# Altium PCB test.PcbDoc
Units mm, origin at the board's own origin, x right, y up, seen from the top; angles counter-clockwise.
Board outline 40 x 60 mm, 4 copper layers (Top Layer, Mid-Layer 1, Mid-Layer 2, Bottom Layer); 24 components, 23 nets, 166 pads, 0 vias.
Unrouted connection lines stored in the file: 42.
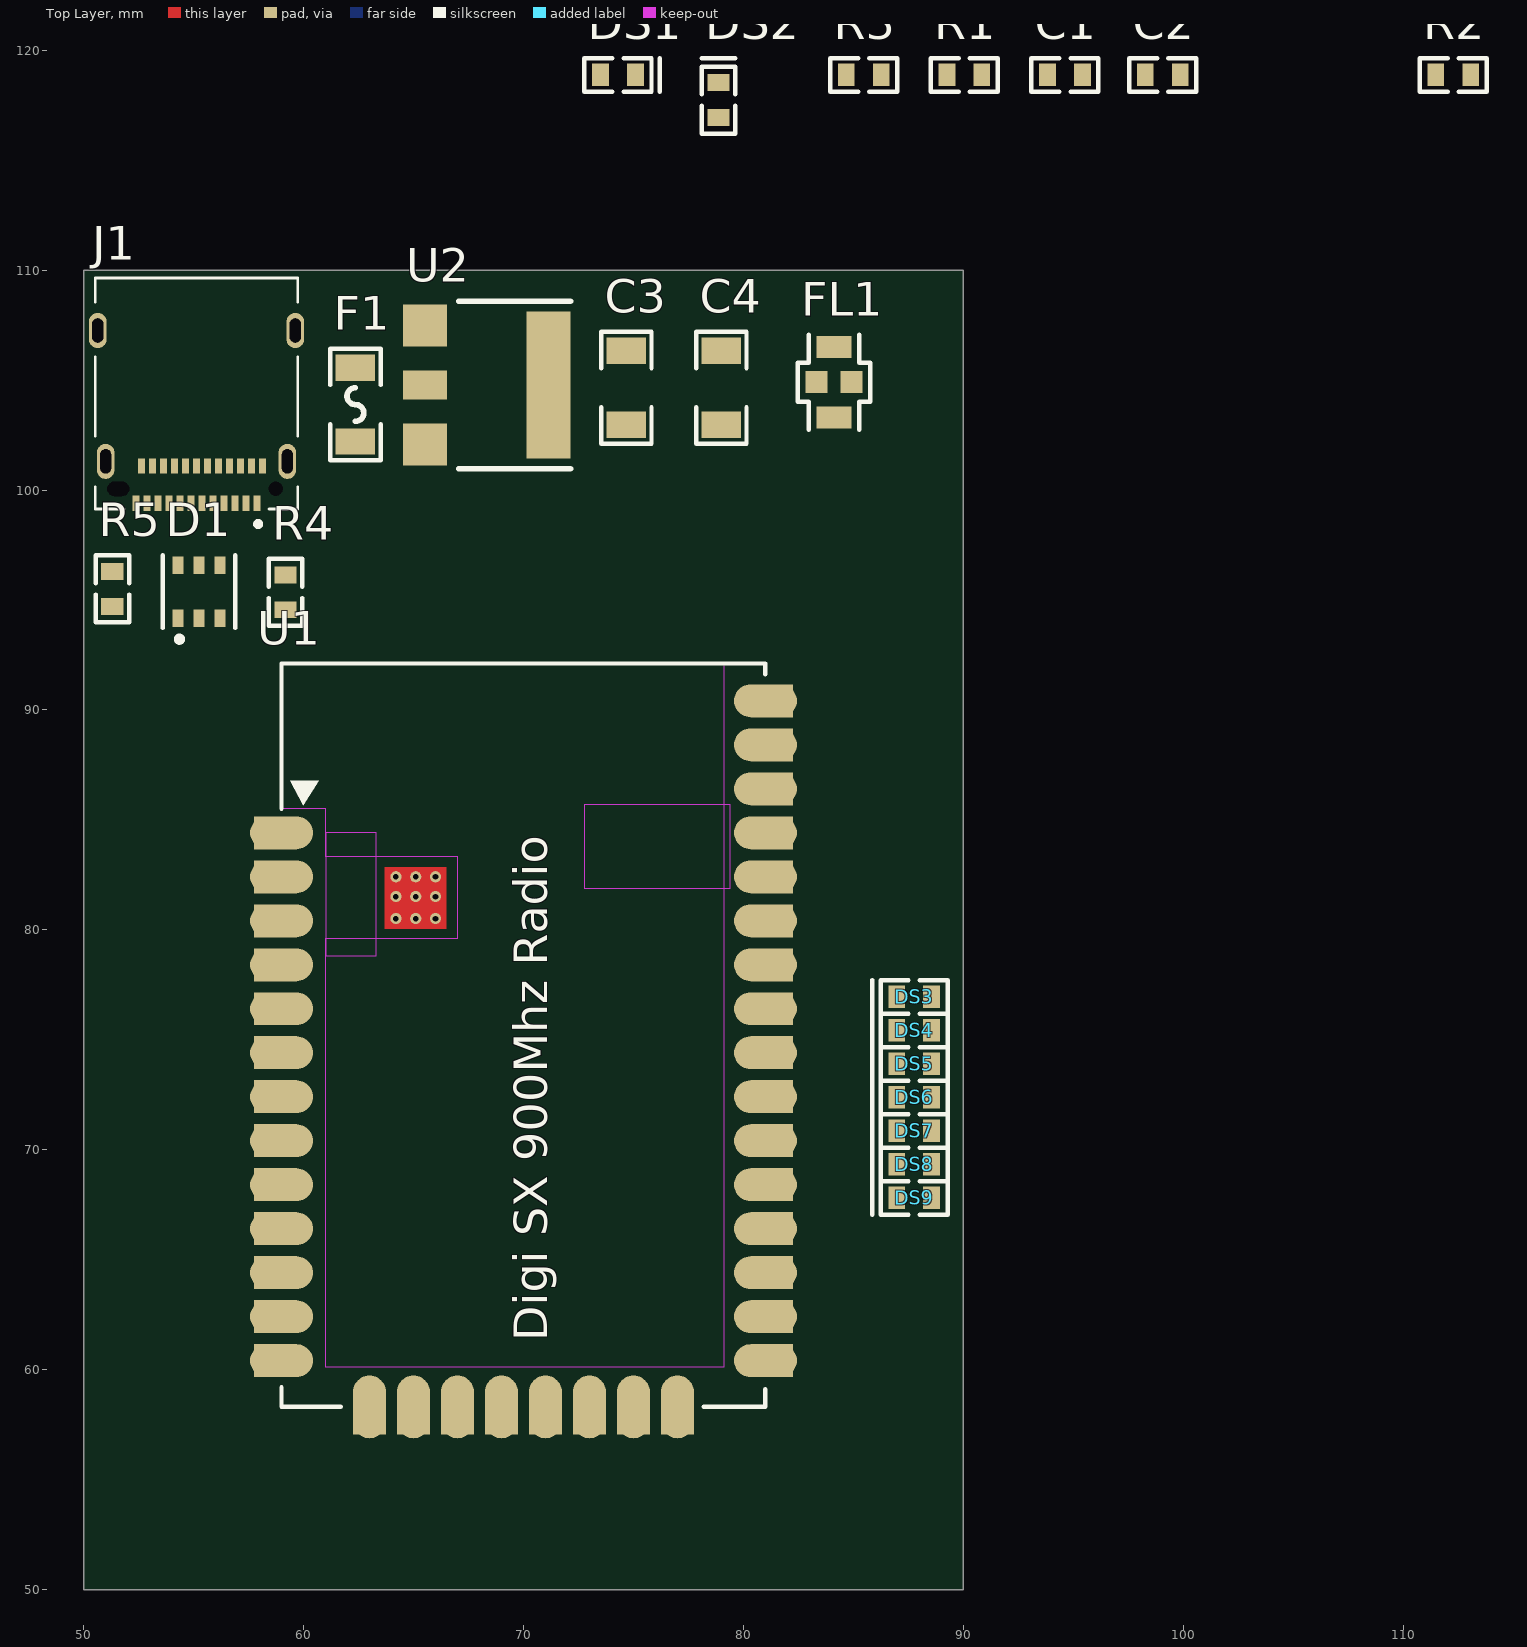
[diagram p0: Top Layer view]
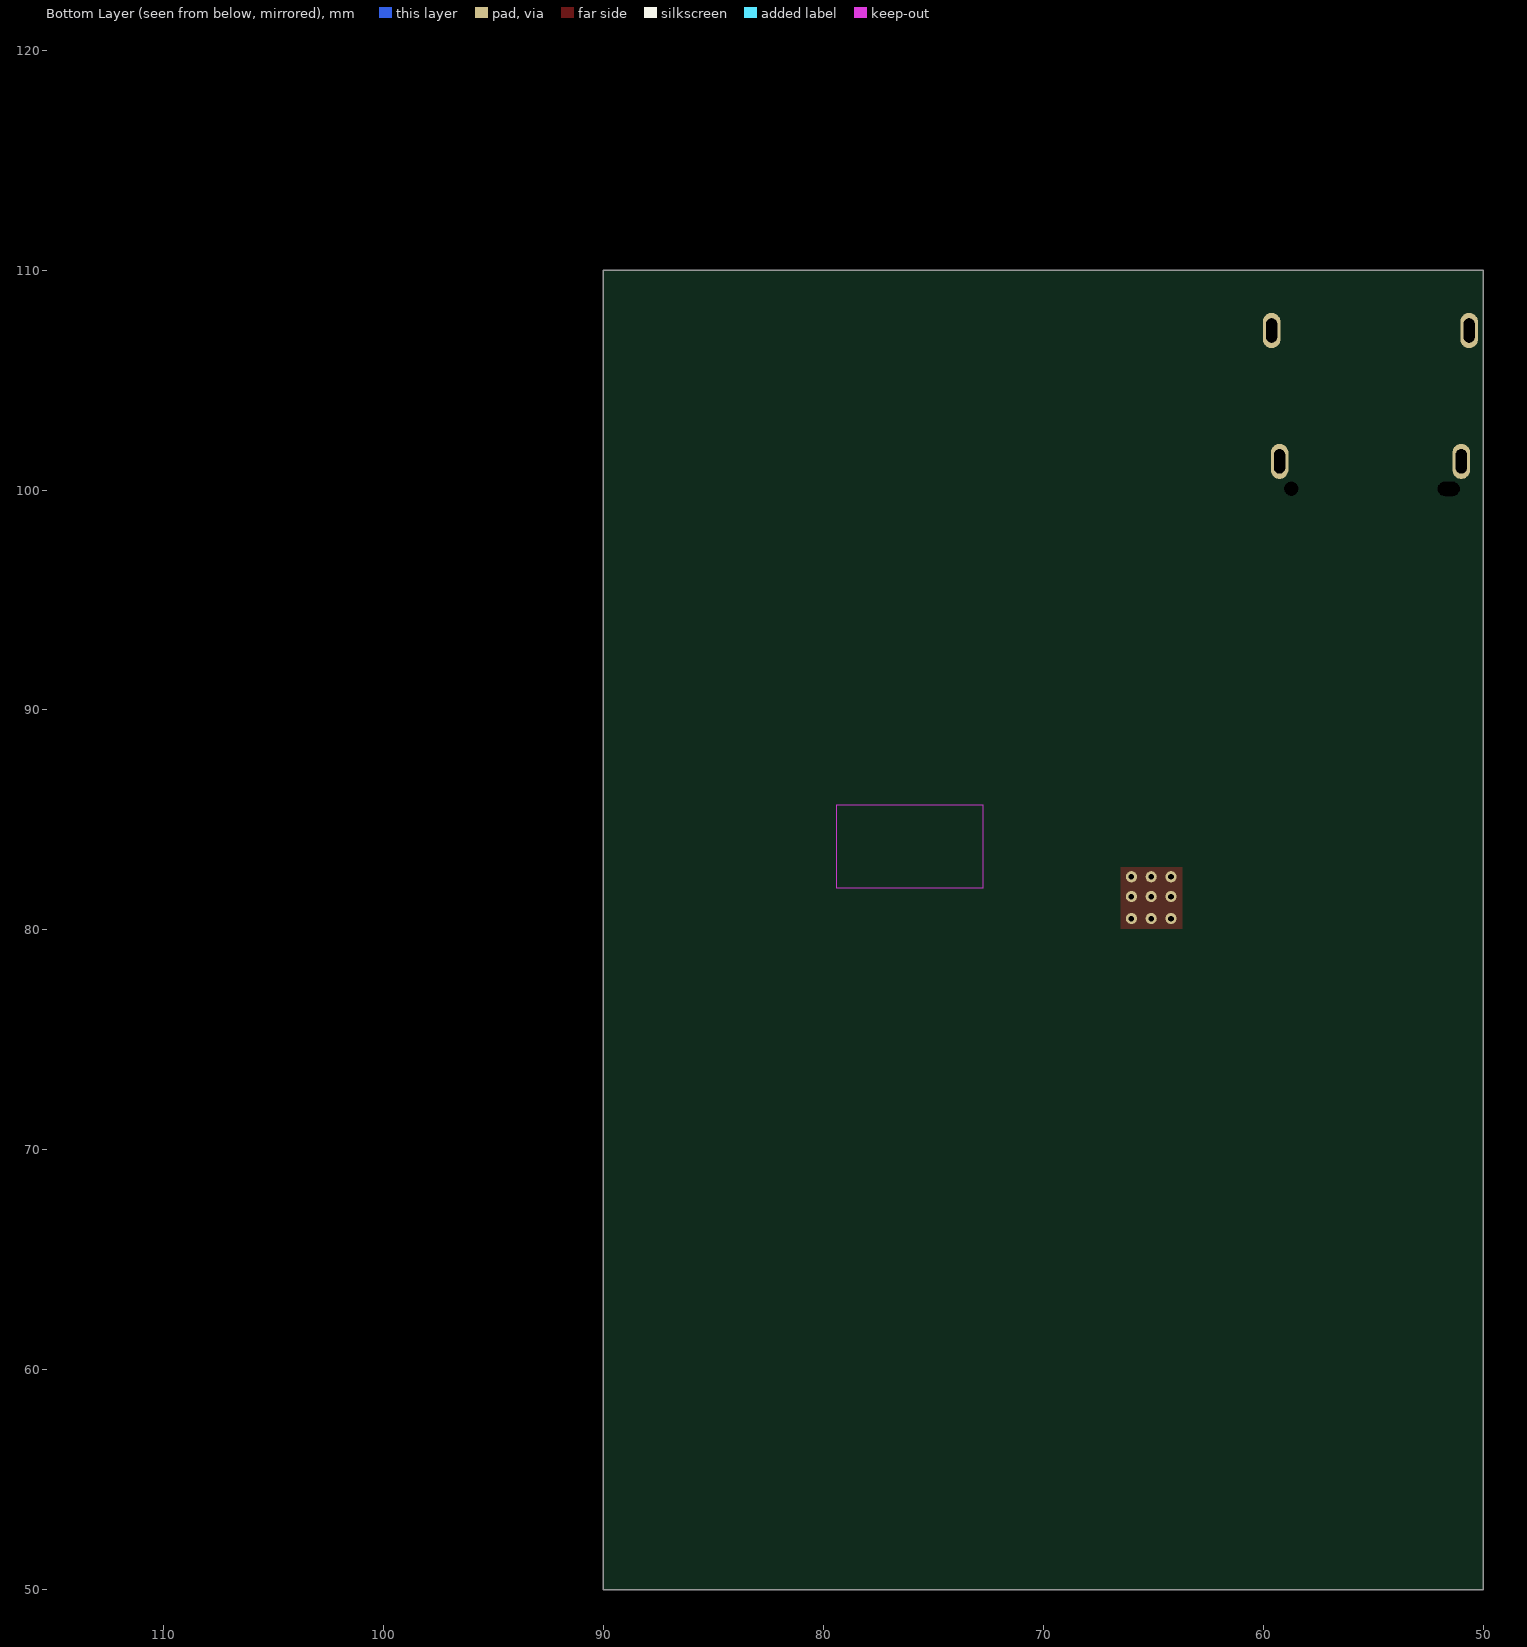
[diagram p1: Bottom Layer view, seen from below]
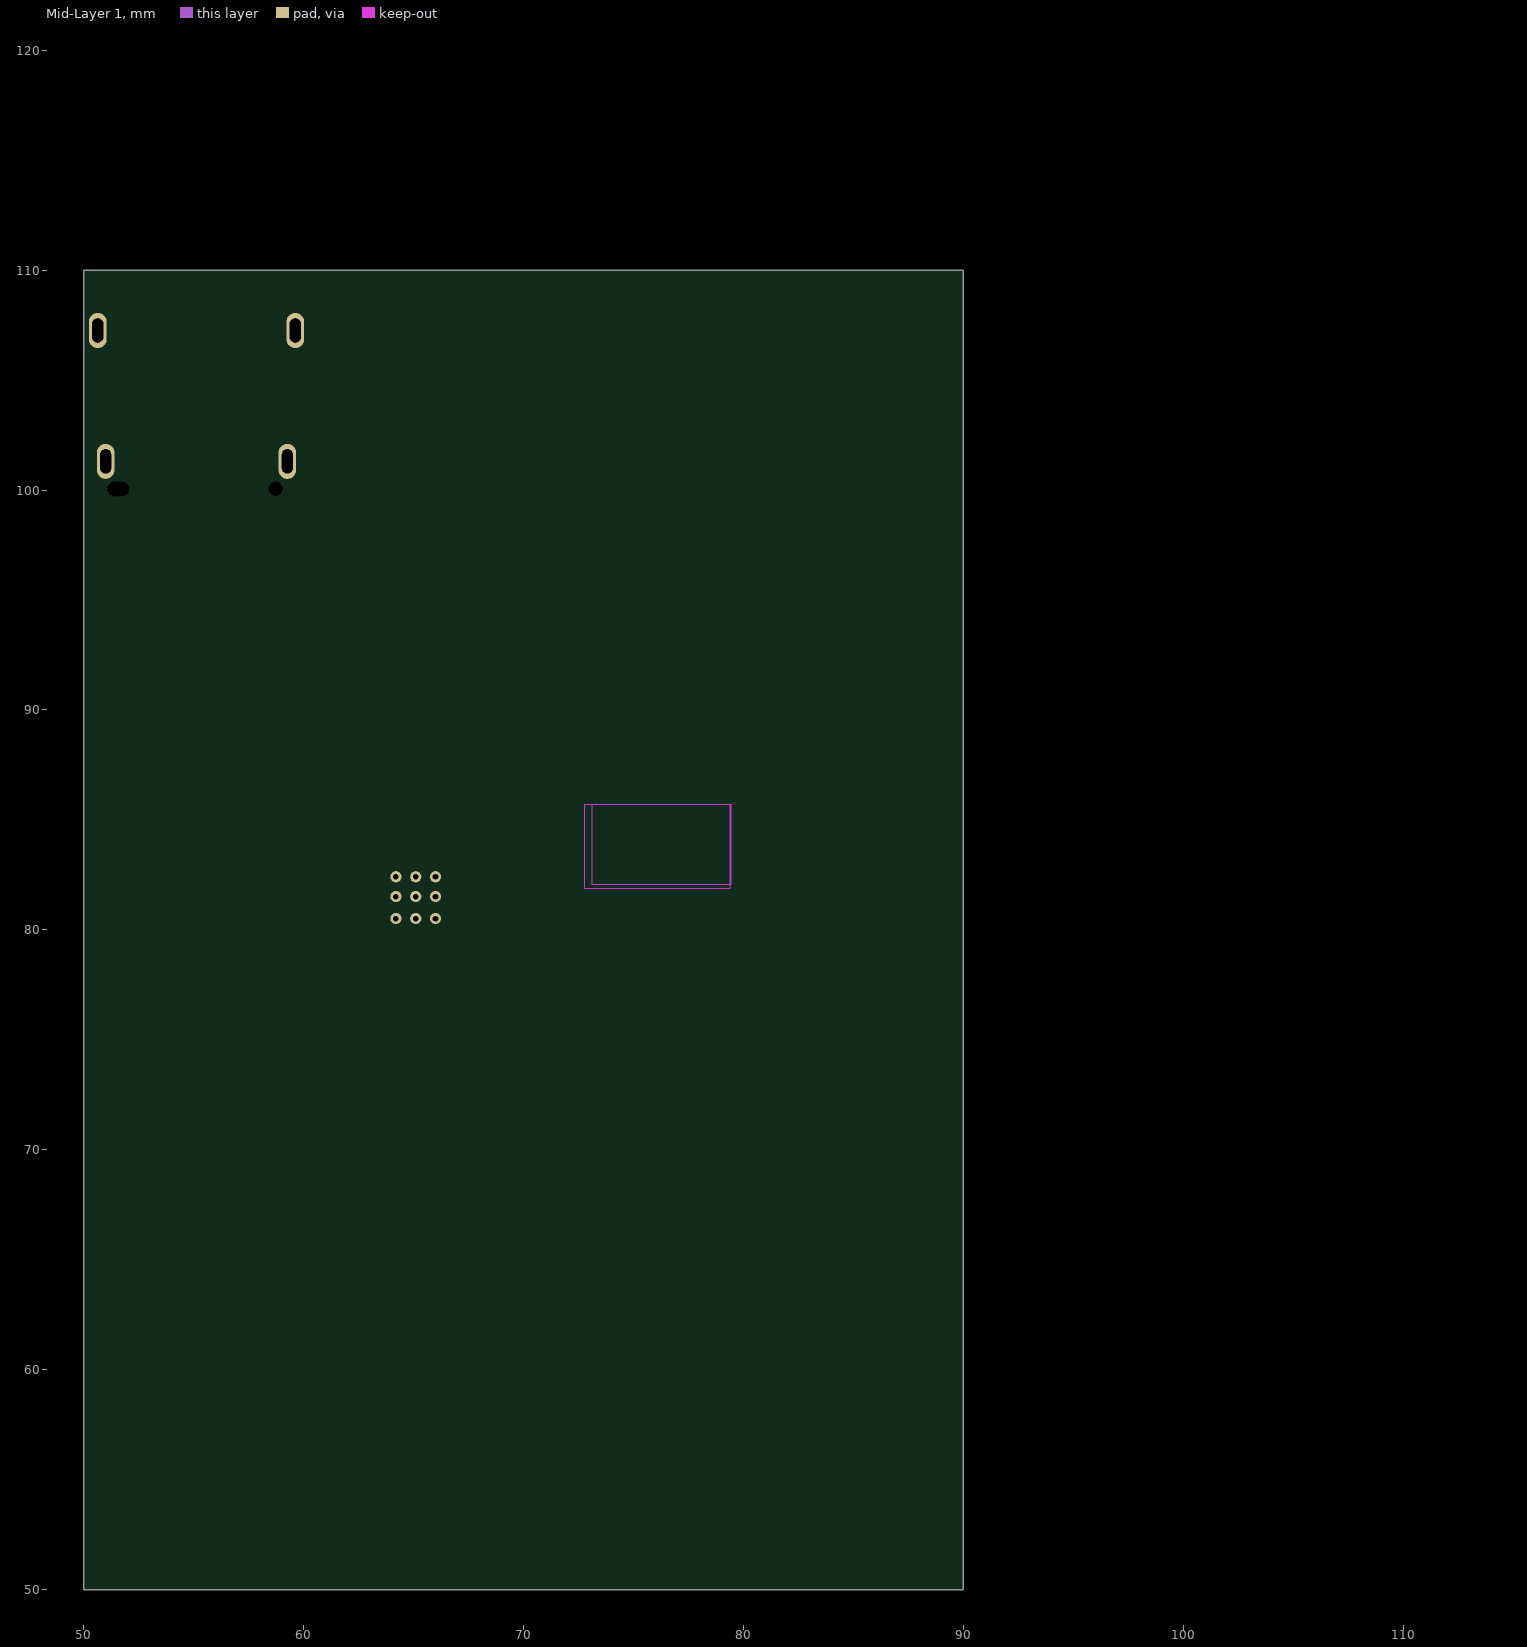
[diagram p2: Mid-Layer 1]
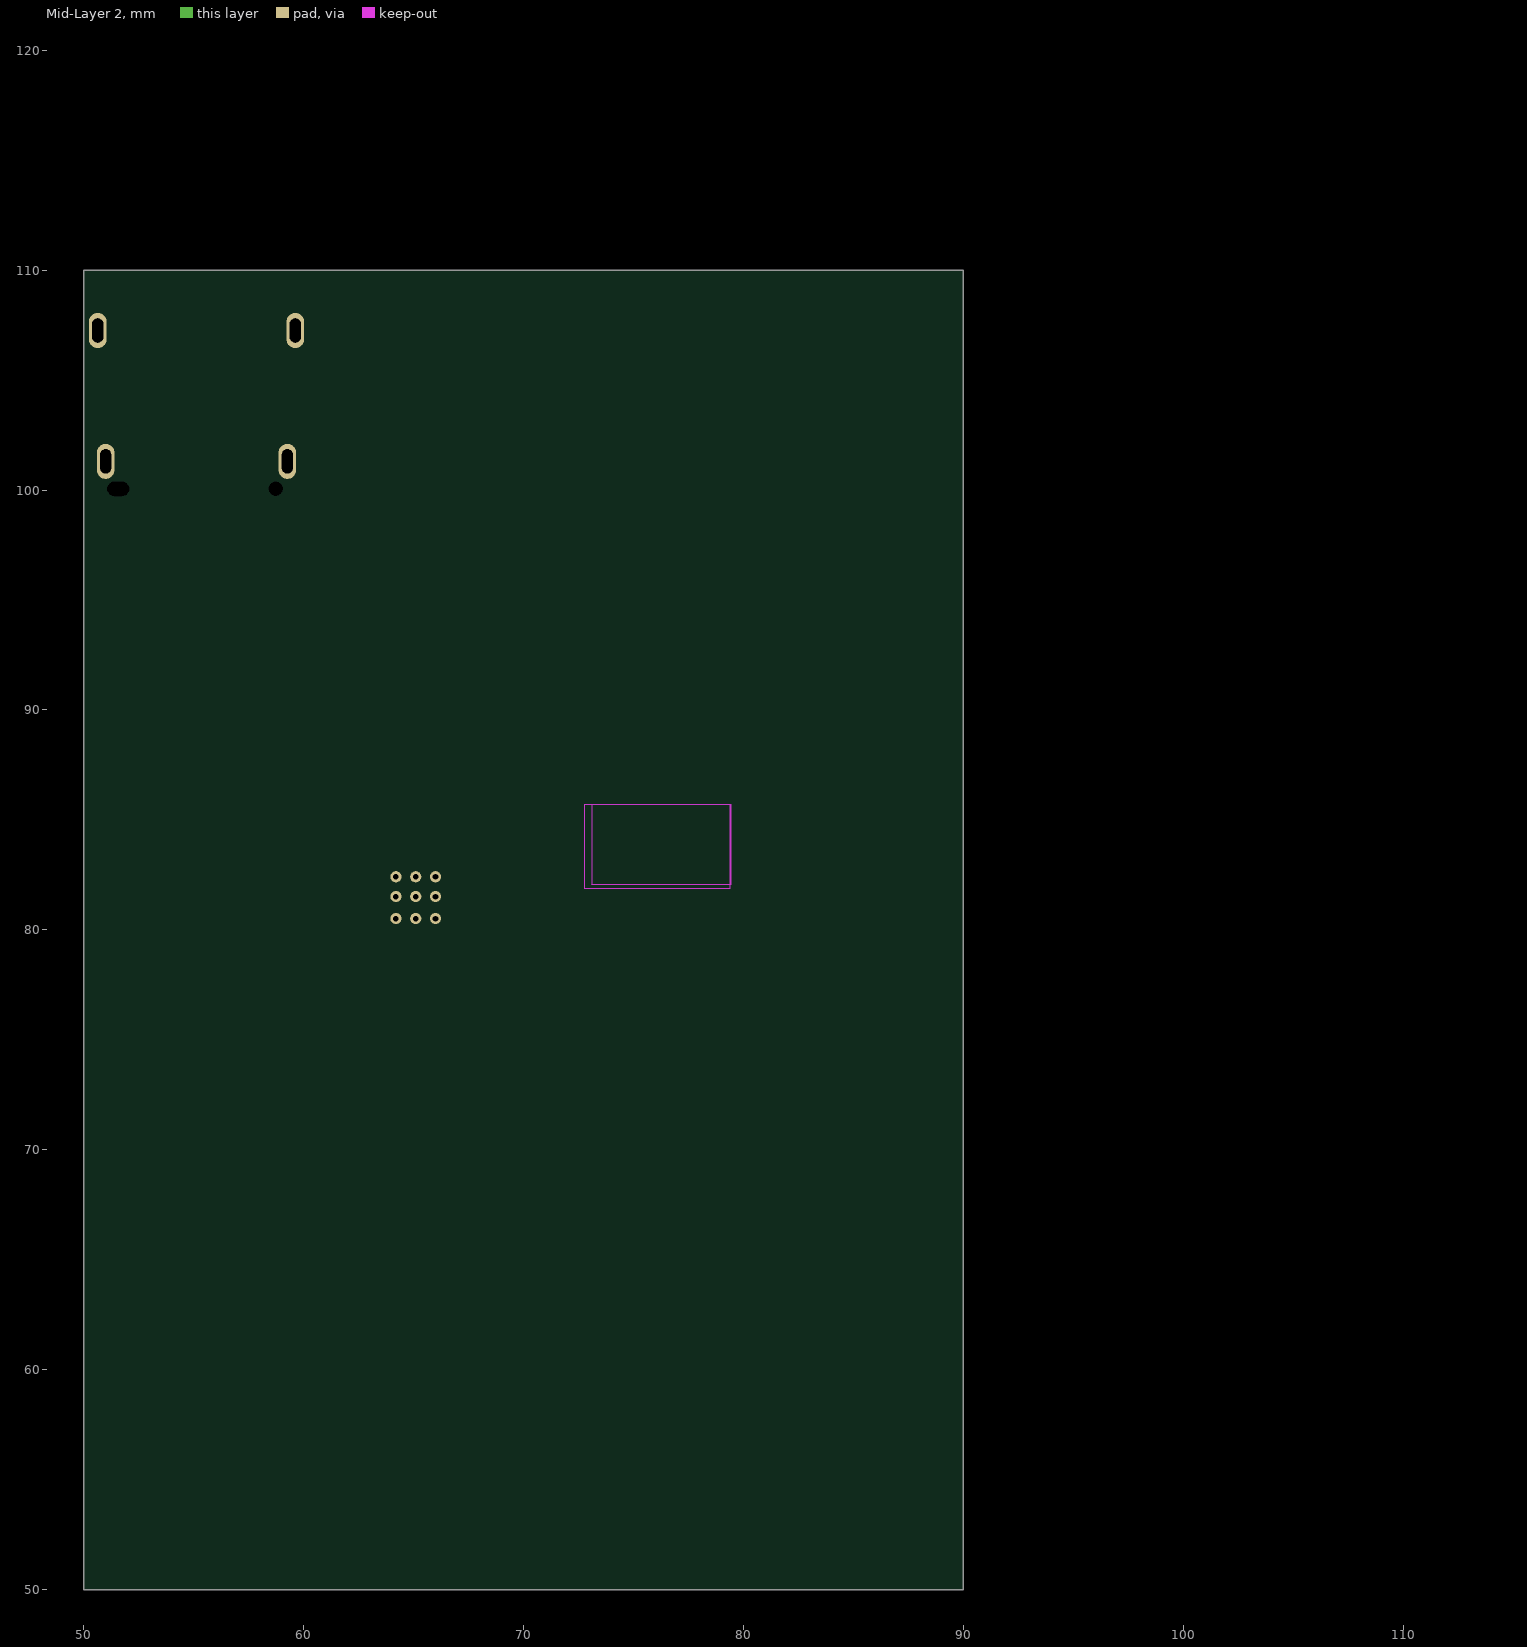
[diagram p3: Mid-Layer 2]

## Layer stack, top to bottom
Top Solder: solder mask 0.0102, Solder Resist, Dk 3.5
Top Layer: signal copper 0.0356
Dielectric 1: dielectric 0.32, FR-4, Dk 4.8
Mid-Layer 1: signal copper 0.0356
Dielectric3: dielectric 0.32, FR-4, Dk 4.8
Mid-Layer 2: signal copper 0.0356
Dielectric2: dielectric 0.32, FR-4, Dk 4.8
Bottom Layer: signal copper 0.0356
Bottom Solder: solder mask 0.0102, Solder Resist, Dk 3.5

## Board outline
50,50 90,50 90,110 50,110

## Design rules (kind name [scope] priority, off if disabled: settings)
Clearance [All] p1: gap=0.254 ignorepadtopadclearanceinfootprint=FALSE except(0: Arc-Hole Track-Hole SMDPad-Hole THPad-Hole Via-Hole Fill-Hole Poly-Hole Region-Hole Text-Hole)
PolygonConnect [All] p1: connectstyle=Relief reliefconductorwidth=0.254 reliefentries=4 polygonreliefangle="90 Angle" airgapwidth=0.254
RoutingVias [All] p1: holewidth=0.711 width=1.27 viastyle="Through Hole" minholewidth=0.711 minwidth=1.27 maxholewidth=0.711 maxwidth=1.27
SolderMaskExpansion [All] p1: expansion=0.102 istentingtop=FALSE
Width [All] p1: maxlimit=0.254 minlimit=0.254 preferedwidth=0.254
30 further rules are at their usual default settings.

## Classes and differential pairs
component class Designator: D1 J1 R4 R5

## Components (designator, comment, footprint, x,y, rotation, side; value= is the part's Value field where it differs from the comment)
C1 "1uF" Cap_Ceramic_0603 94.615,118.872 r0 top
C2 "1uF" Cap_Ceramic_0603 99.06,118.872 r0 top
C3 "10uF 1206" Cap_Ceramic_1206 74.676,104.648 r90 top
C4 "10uF 1206" Cap_Ceramic_1206 78.994,104.648 r90 top
D1 "PRTR5V0U4D" SC-47 55.245,95.377 r90 top
DS1 "LED Green 0603" "LED GREEN 0603" 74.295,118.872 r0 top
DS2 "LED Green 0603" "LED GREEN 0603" 78.867,117.729 r90 top
DS3 "LED Red 0603" "LED RED 0603" 87.757,76.962 r180 top
DS4 "LED Orange 0603" "LED ORANGE 0603" 87.757,75.438 r180 top
DS5 "LED Orange 0603" "LED ORANGE 0603" 87.757,73.914 r180 top
DS6 "LED Yellow 0603" "LED YELLOW 0603" 87.757,72.39 r180 top
DS7 "LED Yellow 0603" "LED YELLOW 0603" 87.757,70.866 r180 top
DS8 "LED Green 0603" "LED GREEN 0603" 87.757,69.342 r180 top
DS9 "LED Green 0603" "LED GREEN 0603" 87.757,67.818 r180 top
F1 "0ZCJ0050FF2G" "1206 Fuse" 62.357,103.886 r90 top
FL1 "NFE31PT101C1E9L" NFE31PT101C1E9L 84.112,104.902 r90 top
J1 "12401610E4#2A" 12401610E4#2A 55.134,100.052 r180 top
R1 "1k" Res_ThinFilm_0603 90.043,118.872 r0 top
R2 "1k" Res_ThinFilm_0603 112.268,118.872 r0 top
R3 "0R" Res_ThinFilm_0603 85.471,118.872 r0 top
R4 "5k1 1%" Res_ThinFilm_0603 59.182,95.346 r90 top
R5 "5k1 1%" Res_ThinFilm_0603 51.308,95.504 r90 top
U1 "XBP9X-DMUS-001" XBee_1W_Base 59,84.418 r0 top
U2 "AZ1117C-3V3" SOT-223 68.326,104.775 r270 top

## Footprints (in the part's own frame and the unit in brackets; to place one, negate y for a bottom-side part, rotate by r counter-clockwise, add the part's x,y. Pads: shape width x height; smd on the part's side, far side on the other; paste and mask are expansions set on the pad)
"1206 Fuse" [mil]
  rect 47x71 smd: 1(-66.08,0) 2(66.08,0)
  silkscreen extent -100,-45 100,45, body extent -67,-33 67,33, height 28
12401610E4#2A [mm]
  rect 0.3x0.7 smd: A1(-2.75,0.66) A2(-2.25,0.66) A3(-1.75,0.66) A4(-1.25,0.66) A5(-0.75,0.66) A6(-0.25,0.66) A7(0.25,0.66) A8(0.75,0.66) A9(1.25,0.66) A10(1.75,0.66) A11(2.25,0.66) A12(2.75,0.66) B1(2.5,-1.04) B2(2,-1.04) B3(1.5,-1.04) B4(1,-1.04) B5(0.5,-1.04) B6(0,-1.04) B7(-0.5,-1.04) B8(-1,-1.04) B9(-1.5,-1.04) B10(-2,-1.04) B11(-2.5,-1.04) B12(-3,-1.04)
  oval 0.8x1.6 hole 0.5 slot 1.1 at 90 deg: S1(-4.13,-1.25) S2(4.13,-1.25) S3(4.49,-7.2) S4(-4.49,-7.2)
  round 0 hole 0.65 unplated: ""(-3.6,0)
  round 0 hole 0.65 slot 1.016 at 0 deg unplated mask+0: ""(3.559,0)
  silkscreen extent -4.6,-9.59 4.6,1.7, body extent -4.6,-9.53 4.6,1.02, height 3.3
Cap_Ceramic_0603 [mil]
  rect 30x40 smd: 1(-31.24,0) 2(31.24,0)
  silkscreen extent -60,-30 60,30, body extent -31,-16 32,16, height 33
Cap_Ceramic_1206 [mil]
  rect 47x71 smd: 1(-66.08,0) 2(66.08,0)
  silkscreen extent -100,-45 100,45, body extent -63,-31 63,32, height 53
"LED GREEN 0603" [mil]
  rect 30x40 smd: 1(-31.24,0) 2(31.24,0)
  silkscreen extent -60,-30 75,30, body extent -40,-20 40,20, height 30
"LED ORANGE 0603" [mil]
  rect 30x40 smd: 1(-31.24,0) 2(31.24,0)
  silkscreen extent -60,-30 75,30, body extent -40,-20 40,20, height 30
"LED RED 0603" [mil]
  rect 30x40 smd: 1(-31.24,0) 2(31.24,0)
  silkscreen extent -60,-30 75,30, body extent -40,-20 40,20, height 30
"LED YELLOW 0603" [mil]
  rect 30x40 smd: 1(-31.24,0) 2(31.24,0)
  silkscreen extent -60,-30 75,30, body extent -40,-20 40,20, height 30
NFE31PT101C1E9L [mm]
  rect 1x1.6 smd: 1(-1.6,0) 3(1.6,0)
  rect 1x1 smd: 2(0,0.8) 2(0,-0.8)
  silkscreen extent -2.16,-1.65 2.16,1.65, body extent -1.6,-0.89 1.6,0.86, height 1.61
Res_ThinFilm_0603 [mil]
  rect 30x40 smd: 1(-31.24,0) 2(31.24,0)
  silkscreen extent -60,-30 60,30, body extent -31,-16 32,16, height 18
SC-47 [mm]
  rect 0.8x0.5 smd: 1(-1.2,0.95) 2(-1.2,0) 3(-1.2,-0.95) 4(1.2,-0.95) 5(1.2,0) 6(1.2,0.95)
  silkscreen extent -2.29,-1.65 1.65,1.65, body extent -1.3,-1.45 1.3,1.45, height 1.14
SOT-223 [mm]
  rect 1.9x2 smd: 1(-2.7,-2.8) 3(2.7,-2.8)
  rect 1.3x2 smd: 2(0,-2.8)
  rect 6.7x2 smd: THERM(0,2.8)
  silkscreen extent -3.81,-1.27 3.81,3.81, body extent -3.15,-3.35 3.15,3.35, height 1.8
XBee_1W_Base [mm]
  rect 1.5x1.5 smd: 1(-0.508,0) 2(-0.508,-2) 3(-0.508,-4) 4(-0.508,-6) 5(-0.508,-8) 6(-0.508,-10) 7(-0.508,-12) 8(-0.508,-14) 9(-0.508,-16) 10(-0.508,-18) 11(-0.508,-20) 12(-0.508,-22) 13(-0.508,-24) 14(3.998,-26.608) 15(5.998,-26.608) 16(7.998,-26.608) 17(9.998,-26.608) 18(11.998,-26.608) 19(13.998,-26.608) 20(15.998,-26.608) 21(17.998,-26.608) 22(22.508,-24) 23(22.508,-22) 24(22.508,-20) 25(22.508,-18) 26(22.508,-16) 27(22.508,-14) 28(22.508,-12) 29(22.508,-10) 30(22.508,-8) 31(22.508,-6) 32(22.508,-4) 33(22.508,-2) 34(22.508,0) 35(22.508,2) 36(22.508,4) 37(22.5,6)
  oval 2.86x1.5 smd: 1(0,0) 2(0,-2) 3(0,-4) 4(0,-6) 5(0,-8) 6(0,-10) 7(0,-12) 8(0,-14) 9(0,-16) 10(0,-18) 11(0,-20) 12(0,-22) 13(0,-24) 22(22,-24) 23(22,-22) 24(22,-20) 25(22,-18) 26(22,-16) 27(22,-14) 28(22,-12) 29(22,-10) 30(22,-8) 31(22,-6) 32(22,-4) 33(22,-2) 34(22,0) 35(22,2) 36(22,4) 37(22,6)
  oval 1.5x2.86 smd: 14(3.998,-26.1) 15(5.998,-26.1) 16(7.998,-26.1) 17(9.998,-26.1) 18(11.998,-26.1) 19(13.998,-26.1) 20(15.998,-26.1) 21(17.998,-26.1)
  round 0.508 hole 0.254: 38(5.2,-3.9) 38(5.2,-2.9) 38(5.2,-2) 38(6.1,-3.9) 38(6.1,-2.9) 38(6.1,-2) 38(7,-3.9) 38(7,-2.9) 38(7,-2)
  round 0.2 smd: 38(6.2,-2.9)
  Top Layer region: 4.699,-4.369 7.493,-4.369 7.493,-1.575 4.699,-1.575
  Top Layer keep-out region: 2,0 2,-5.6 4.3,-5.6 4.3,0
  Top Layer keep-out region: 0,7.7 20.1,7.7 20.1,-24.3 2,-24.3 2,-4.8 8,-4.8 8,-1.1 2,-1.1 2,1.1 0,1.1
  Mid-Layer 1 keep-out region: 20.422,1.295 20.422,-2.362 14.122,-2.362 14.097,-2.337 14.122,-2.311 14.122,1.295
  Mid-Layer 2 keep-out region: 20.422,1.295 20.422,-2.362 14.122,-2.362 14.097,-2.337 14.122,-2.311 14.122,1.295
  Keep-Out Layer region: 13.75,1.27 13.75,-2.515 20.396,-2.515 20.396,1.27
  silkscreen extent 0,-26.09 22,7.7, body extent -0.1,-26.11 22,7.67, height 1.85

## Part data
C1 C2: library part "1uF 25V 5% X7R 0603", "Capacitor, Ceramic, SMD, 1uF, 25V, 5%, X7R, 0603"
C3 C4: library part "10uF 25V 10% X7R 1206", "Capacitor, Ceramic, SMD, 10uF, 25V, 10%, X7R, 1206"
D1: "Clamp Ipp Tvs Diode Surface Mount 6-TSOP"
F1: "Polymeric PTC Resettable Fuse 8V 500mA Ih Surface Mount 1206 (3216 Metric), Concave"
FL1: "LC (T-Type) EMI Filter 3rd Order Low Pass 1 Channel C = 100pF 6A 1206 (3216 Metric), 3 PC Pad"
J1: "USB-C (USB TYPE-C) USB 3.2 Gen 2 (USB 3.1 Gen 2, Superspeed + (USB 3.1)) Receptacle Connector 24 Position Surface Mount, Right Angle; Through Hole"
R1 R2: library part "1k 5% 0603", "Resistor, SMD, 1k, 0.1W, 5%, 0603"
R3: library part "0R 5% 0603", "Resistor, SMD, 0R, 0.1W, 5%, 0603"
R4 R5: library part "5k1 1% 0603", "Resistor, SMD, 5k1, 0.1W, 1%, 0603"
U1: "General ISM < 1GHz Transceiver Module 902MHz ~ 928MHz Antenna Not Included, U.FL Surface Mount"
U2: "Linear Voltage Regulator IC 1 Output 1A SOT-223"

## Nets (pads, with @x,y where several pads share a name; then routed paths per layer and width w, separated by ;. In a path a pad name is that pad's centre, name@x,y a point inside that pad or via, vN(x,y) a via of type N, cw(c..) or ccw(c..) an arc to the next point about the centre after c; other vN are vias at no path point)
3V3: C3.2 C4.2 FL1.3 R2.2
GND: C3.1 C4.1 D1.2 DS2.2 J1.A1 J1.A12 J1.B1 J1.B12 J1.S1 J1.S2 J1.S3 J1.S4 R3.2 R4.1 R5.1
N3V3: C2.2 FL1.1 U2.2
NetC1_2: C1.2 F1.2 R1.2 U2.3
NetDS1_1: DS1.1 R1.1
NetDS2_1: DS2.1 R2.1
NGND: C1.1 C2.1 DS1.2 FL1.2 R3.1 U2.1
"USB CC1": J1.A5 R4.2
"USB CC2": J1.B5 R5.2
"USB D_N": D1.1 D1.6 J1.A7 J1.B7
"USB D_P": D1.3 D1.4 J1.A6 J1.B6
"USB RX1_N": J1.B10
"USB RX1_P": J1.B11
"USB RX2_N": J1.A10
"USB RX2_P": J1.A11
"USB SBU1": J1.A8
"USB SBU2": J1.B8
"USB TX1_N": J1.A3
"USB TX1_P": J1.A2
"USB TX2_N": J1.B3
"USB TX2_P": J1.B2
VBUS: D1.5
VUSB: F1.1 J1.A4 J1.A9 J1.B4 J1.B9
pads on no net: DS3.1 DS3.2 DS4.1 DS4.2 DS5.1 DS5.2 DS6.1 DS6.2 DS7.1 DS7.2 DS8.1 DS8.2 DS9.1 DS9.2 J1. U1.1 U1.2 U1.3 U1.4 U1.5 U1.6 U1.7 U1.8 U1.9 U1.10 U1.11 U1.12 U1.13 U1.14 U1.15 U1.16 U1.17 U1.18 U1.19 U1.20 U1.21 U1.22 U1.23 U1.24 U1.25 U1.26 U1.27 U1.28 U1.29 U1.30 U1.31 U1.32 U1.33 U1.34 U1.35 U1.36 U1.37 U1.38 U2.THERM

## Silkscreen, mask and mechanical layers (free items; w line width, h text height)
Mechanical 1:
  the board outline again, w0.254

## Text inside footprints (layer, text, board x,y; h text height)
U1: Top Overlay "Digi SX 900Mhz Radio" at 71.091,61.304 h1.52 r90; Mechanical 3 "14" at 62.288,59.726 h1.27; Mechanical 3 "21" at 76.388,59.726 h1.27; Mechanical 3 "37" at 78,89.718 h1.27; Mechanical 3 "1" at 60.5,83.693 h1.27